# Altium PCB DXv2.pcbdoc (part 2 of 3)
Units mil, origin at the board's own origin, x right, y up, seen from the top; angles counter-clockwise.
Board outline 12846.15 x 9153.85 mil, 2 copper layers (TopLayer, BottomLayer); 114 components, 102 nets, 394 pads, 175 vias.
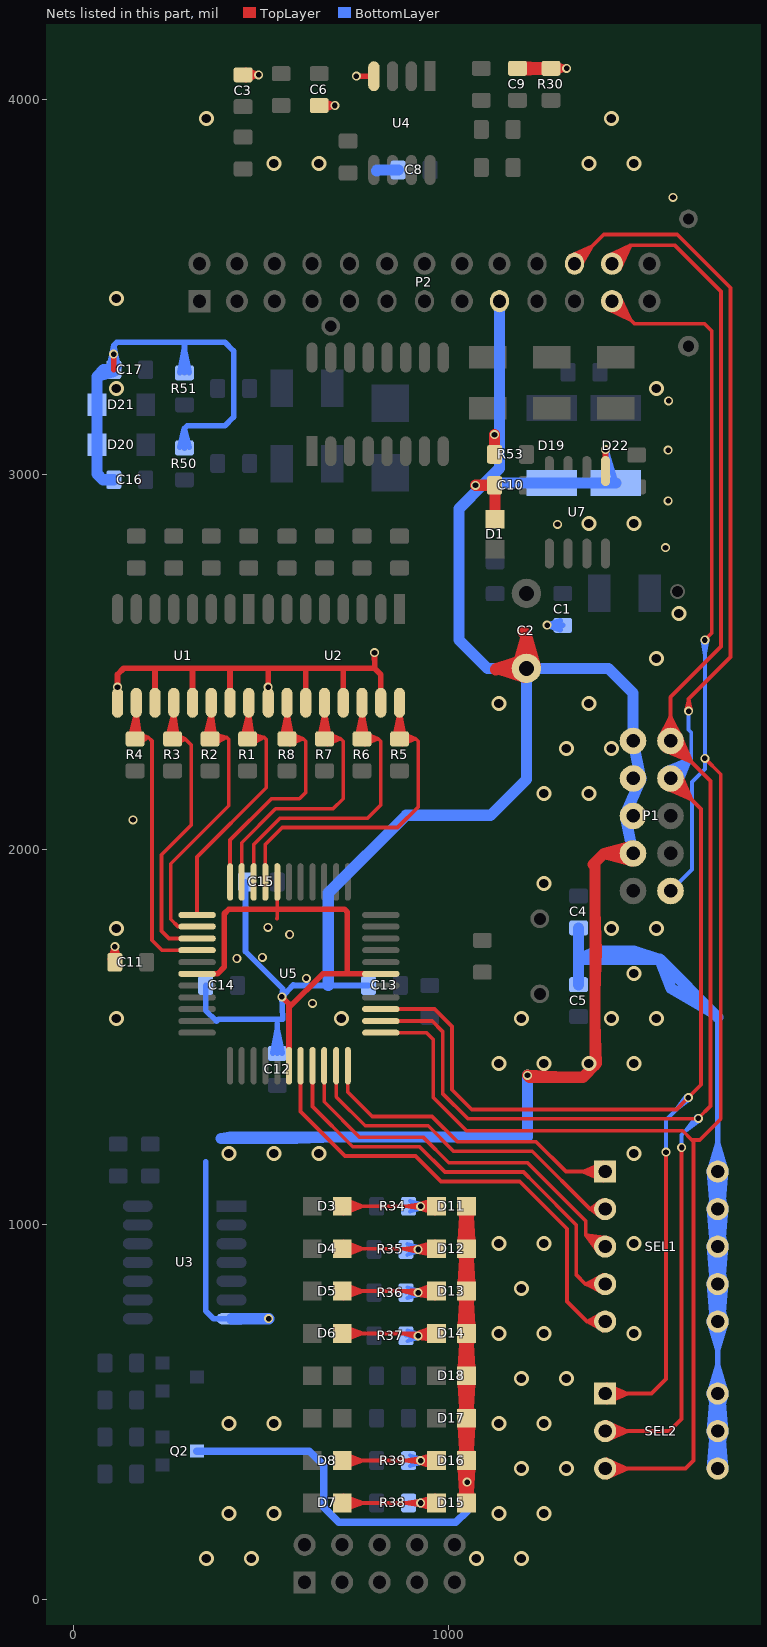
[diagram p2: the nets of this part, all layers, seen from the top]

## Via types
v1: diameter 24, hole 15, TopLayer to BottomLayer, tented both sides, 115 vias
v2: diameter 40, hole 25, TopLayer to BottomLayer, tented both sides, 60 vias

## Nets (pads, with @x,y where several pads share a name; then routed paths per layer and width w, separated by ;. In a path a pad name is that pad's centre, name@x,y a point inside that pad or via, vN(x,y) a via of type N, cw(c..) or ccw(c..) an arc to the next point about the centre after c; other vN are vias at no path point) (continued)
COM2: D11.1 D12.1 D13.1 D14.1 D15.1 D16.1 D17.1 D18.1 Q2.1 | length 9973.8
  TopLayer w20: D17.1@1034.21,484.72 1038.97,398.91 ; D18.1@1034.21,596.79 1038.97,682.6 ; D18.1@1034.21,597.75 1038.97,511.94 ; D14.1@1034.21,709.82 1038.97,795.63 ; D13.1@1034.21,822.84 1038.97,908.65 ; D12.1@1034.21,935.87 1038.97,1021.68 ; D16.1@1034.26,372.54 1049.2,456.21 ; D17.1@1034.26,482.92 1049.2,399.24 D17.1@1064.14,482.92 ; D17.1@1034.26,485.56 1049.2,569.24 ; D18.1@1034.26,595.94 1049.2,512.27 D18.1@1064.14,595.94 ; D18.1@1034.26,598.59 1049.2,682.27 D18.1@1064.14,598.59 ; D14.1@1034.26,708.97 1049.2,625.29 ; D14.1@1034.26,711.62 1049.2,795.29 D14.1@1064.14,711.62 ; D13.1@1034.26,822 1049.2,738.32 ; D13.1@1034.26,824.65 1049.2,908.32 D13.1@1064.14,824.65 ; D12.1@1034.26,935.03 1049.2,851.35 ; D12.1@1034.26,937.67 1049.2,1021.35 D12.1@1064.14,937.67 ; D11.1@1034.26,1048.05 1049.2,964.38 ; D17.1@1034.52,481.16 1059.43,398.91 ; D18.1@1034.52,594.19 1059.43,511.94 ; D18.1@1034.52,600.35 1059.43,682.6 ; D14.1@1034.52,713.37 1059.43,795.63 ; D13.1@1034.52,826.4 1059.43,908.65 ; D12.1@1034.52,939.43 1059.43,1021.68 ; D11.1@1049.2,1049.38 D12.1@1049.2,936.35 ; D17.1@1063.88,481.16 1038.97,398.91 ; D18.1@1063.88,594.19 1038.97,511.94 ; D18.1@1063.88,600.35 1038.97,682.6 ; D14.1@1063.88,713.37 1038.97,795.63 ; D13.1@1063.88,826.4 1038.97,908.65 ; D12.1@1063.88,939.43 1038.97,1021.68 ; D16.1@1064.14,372.54 1049.2,456.21 ; D17.1@1064.14,485.56 1049.2,569.24 ; D14.1@1064.14,708.97 1049.2,625.29 ; D13.1@1064.14,822 1049.2,738.32 ; D12.1@1064.14,935.03 1049.2,851.35 ; D11.1@1064.14,1048.05 1049.2,964.38 ; D17.1@1064.19,484.72 1059.43,398.91 ; D18.1@1064.19,596.79 1059.43,682.6 ; D18.1@1064.19,597.75 1059.43,511.94 ; D14.1@1064.19,709.82 1059.43,795.63 ; D13.1@1064.19,822.84 1059.43,908.65 ; D12.1@1064.19,935.87 1059.43,1021.68 ; 1038.97,285.88 1063.88,368.13 v1(1051.14,313.76) ; 1038.97,285.88 1034.21,371.69 v1(1051.14,313.76) ; 1038.97,285.88 D16.1@1049.2,371.21 ; 1038.97,285.88 v1(1051.14,313.76) ; 1038.97,285.88 v1(1051.14,313.76) ; 1038.97,285.88 v1(1051.14,313.76) ; 1038.97,398.91 D17.1@1049.2,484.24 ; 1038.97,511.94 D18.1@1049.2,597.27 ; 1038.97,682.6 D18.1@1049.2,597.27 ; 1038.97,795.63 D14.1@1049.2,710.29 ; 1038.97,908.65 D13.1@1049.2,823.32 ; 1038.97,1021.68 D12.1@1049.2,936.35 ; 1049.2,286.21 1064.14,369.89 v1(1051.14,313.76) ; 1049.2,286.21 1034.26,369.89 v1(1051.14,313.76) ; 1049.2,286.21 v1(1051.14,313.76) ; 1049.2,286.21 v1(1051.14,313.76) ; 1049.2,343.19 1034.26,259.51 v1(1051.14,313.76) ; 1049.2,343.19 1064.14,259.51 v1(1051.14,313.76) ; 1049.2,343.19 1063.65,367.2 1049.2,343.19 ; 1049.2,343.19 1034.75,367.2 1049.2,343.19 ; 1049.2,343.19 D16.1@1049.2,371.21 ; 1049.2,343.19 D16.1@1049.2,371.21 ; 1049.2,343.19 v1(1051.14,313.76) ; 1049.2,343.19 v1(1051.14,313.76) ; D16.1@1049.2,371.21 D15.1@1049.2,258.19 v1(1051.14,313.76) ; D16.1@1049.2,371.21 D17.1@1049.2,484.24 ; D16.1@1049.2,371.21 1059.43,285.88 ; D16.1@1049.2,371.21 v1(1051.14,313.76) ; D16.1@1049.2,371.21 v1(1051.14,313.76) ; D16.1@1049.2,371.21 v1(1051.14,313.76) ; 1049.2,456.21 1063.65,480.23 1049.2,456.21 ; 1049.2,456.21 1034.75,480.23 1049.2,456.21 ; 1049.2,456.21 D17.1@1049.2,484.24 ; 1049.2,456.21 D17.1@1049.2,484.24 ; D17.1@1049.2,484.24 D18.1@1049.2,597.27 ; D17.1@1049.2,484.24 1059.43,398.91 ; 1049.2,569.24 1063.65,593.25 1049.2,569.24 ; 1049.2,569.24 1034.75,593.25 1049.2,569.24 ; 1049.2,569.24 D18.1@1049.2,597.27 ; 1049.2,569.24 D18.1@1049.2,597.27 ; D18.1@1049.2,597.27 D14.1@1049.2,710.29 ; D18.1@1049.2,597.27 1059.43,682.6 ; D18.1@1049.2,597.27 1049.2,625.29 ; D18.1@1049.2,597.27 1059.43,511.94 ; D18.1@1049.2,597.27 1049.2,625.29 ; 1049.2,625.29 1034.75,601.28 1049.2,625.29 ; 1049.2,625.29 1063.65,601.28 1049.2,625.29 ; D14.1@1049.2,710.29 D13.1@1049.2,823.32 ; D14.1@1049.2,710.29 1059.43,795.63 ; D14.1@1049.2,710.29 1049.2,738.32 ; D14.1@1049.2,710.29 1049.2,738.32 ; 1049.2,738.32 1034.75,714.31 1049.2,738.32 ; 1049.2,738.32 1063.65,714.31 1049.2,738.32 ; D13.1@1049.2,823.32 D12.1@1049.2,936.35 ; D13.1@1049.2,823.32 1059.43,908.65 ; D13.1@1049.2,823.32 1049.2,851.35 ; D13.1@1049.2,823.32 1049.2,851.35 ; 1049.2,851.35 1034.75,827.34 1049.2,851.35 ; 1049.2,851.35 1063.65,827.34 1049.2,851.35 ; D12.1@1049.2,936.35 1059.43,1021.68 ; D12.1@1049.2,936.35 1049.2,964.38 ; D12.1@1049.2,936.35 1049.2,964.38 ; 1049.2,964.38 1034.75,940.36 1049.2,964.38 ; 1049.2,964.38 1063.65,940.36 1049.2,964.38 ; v1(1051.14,313.76) 1064.19,371.69 1059.43,285.88 ; v1(1051.14,313.76) 1059.43,285.88 ; v1(1051.14,313.76) 1059.43,285.88 ; v1(1051.14,313.76) 1059.43,285.88 ; v1(1051.14,313.76) 1034.52,368.13 1059.43,285.88
  BottomLayer w20: Q2.1@330.56,396.69 630.58,396.69 668.5,358.78 668.5,246.24 708.31,206.42 1020.85,206.42 1051.14,236.71 v1(1051.14,313.76) v1@1050.27,314.63 ; Q2.1@331.54,396.69 409.26,396.69
DI01: R1.1 U1.16 U5.23 | length 1262.8
  TopLayer w10: U5.23@330.85,1826.18 330.85,1981.09 515.3,2165.54 515.3,2293.96 509.01,2300.25 ; R1.1@465.52,2300.25 509.01,2300.25 ; R1.1@470.52,2295.59 509.01,2300.25 ; R1.1@471.63,2310.55 509.01,2300.25 ; R1.1@475.17,2281.33 509.01,2300.25
  TopLayer w15: R1.1@465.52,2300.25 468.74,2303.48 U1.16@468.74,2391.99 ; U1.16@465.52,2391.99 U1.16@465.52,2396.65 ; R1.1@468.74,2306.99 U1.16@468.74,2366.99 ; U1.16@468.74,2360.85 453.15,2297.4 U1.16@468.74,2360.89 ; U1.16@468.74,2360.85 478.01,2296.17 U1.16@468.74,2360.89 ; U1.16@468.74,2360.85 R1.1@465.52,2295.59 U1.16@468.74,2360.89
DI02: R2.1 U1.14 U5.24 | length 1340
  TopLayer w10: U5.24@330.85,1795.18 280.25,1795.18 260.85,1814.58 260.85,1963.03 415.3,2117.48 415.3,2293.96 409.01,2300.25 ; R2.1@365.52,2300.25 409.01,2300.25 ; R2.1@370.52,2295.59 409.01,2300.25 ; R2.1@371.63,2310.55 409.01,2300.25 ; R2.1@375.17,2281.33 409.01,2300.25
  TopLayer w15: R2.1@365.52,2300.25 368.75,2303.48 U1.14@368.75,2391.99 ; U1.14@365.52,2391.99 U1.14@365.52,2396.65 ; R2.1@368.75,2306.99 U1.14@368.75,2366.99 ; U1.14@368.75,2360.85 353.15,2297.4 U1.14@368.75,2360.89 ; U1.14@368.75,2360.85 378.01,2296.17 U1.14@368.75,2360.89 ; U1.14@368.75,2360.85 R2.1@365.52,2295.59 U1.14@368.75,2360.89
DI03: R3.1 U1.12 U5.25 | length 1325.3
  TopLayer w10: R3.1@265.52,2295.59 299.37,2295.59 ; R3.1@270.52,2295.59 299.37,2295.59 ; R3.1@274.42,2281.1 299.37,2295.59 ; R3.1@274.42,2310.07 299.37,2295.59 ; U5.25@330.85,1763.18 256.19,1763.18 235.85,1783.53 235.85,1986.51 315.3,2065.96 315.3,2279.66 299.37,2295.59
  TopLayer w15: R3.1@265.52,2300.25 268.75,2303.48 U1.12@268.75,2391.99 ; U1.12@265.52,2391.99 U1.12@265.52,2396.65 ; R3.1@268.75,2306.99 U1.12@268.75,2366.99 ; U1.12@268.75,2360.85 253.15,2297.4 U1.12@268.75,2360.89 ; U1.12@268.75,2360.85 278.01,2296.17 U1.12@268.75,2360.89 ; U1.12@268.75,2360.85 R3.1@265.52,2295.59 U1.12@268.75,2360.89
DI04: R4.1 U1.10 U5.26 | length 1355.3
  TopLayer w10: R4.1@168.75,2300.25 200.87,2300.25 ; R4.1@170.52,2295.59 200.87,2300.25 ; R4.1@171.93,2310.52 200.87,2300.25 ; R4.1@176.35,2281.77 200.87,2300.25 ; U5.26@330.85,1732.18 237.41,1732.18 210.85,1758.75 210.85,2290.27 200.87,2300.25
  TopLayer w15: U1.10@165.52,2391.99 U1.10@165.52,2396.65 ; R4.1@168.75,2306.99 U1.10@168.75,2366.99 ; U1.10@168.75,2391.99 168.75,2300.25 168.75,2298.81 R4.1@165.52,2295.59 ; R4.1@165.52,2295.59 U1.10@168.75,2360.8 ; R4.1@165.52,2295.59 U1.10@168.75,2360.89 ; U1.10@168.75,2360.8 153.15,2297.4 U1.10@168.75,2360.89 ; U1.10@168.75,2360.8 178.01,2296.17 U1.10@168.75,2360.89
DI05: R5.1 U2.16 U5.19 | length 1438.3
  TopLayer w10: U5.19@512.85,1914.18 512.85,2013.93 558.1,2059.18 865.6,2059.18 920.46,2114.04 920.46,2289.29 914.17,2295.59 ; R5.1@870.69,2295.59 914.17,2295.59 ; R5.1@875.69,2295.59 914.17,2295.59 ; R5.1@878.61,2280.87 914.17,2295.59 ; R5.1@878.61,2310.3 914.17,2295.59
  TopLayer w15: R5.1@870.69,2306.99 U2.16@870.69,2366.99 ; U2.16@870.69,2391.99 R5.1@870.69,2295.59 ; R5.1@870.69,2295.59 U2.16@870.69,2360.59 ; R5.1@870.69,2295.59 U2.16@870.69,2360.59 ; U2.16@870.69,2360.59 858.24,2296.79 U2.16@870.69,2360.59 ; U2.16@870.69,2360.59 883.13,2296.79 U2.16@870.69,2360.59
DI06: R6.1 U2.14 U5.20 | length 1301.5
  TopLayer w10: U5.20@481.85,1914.18 481.85,2014.35 551.68,2084.18 785.42,2084.18 820.46,2119.23 820.46,2289.29 814.17,2295.59 ; R6.1@770.69,2295.59 814.17,2295.59 ; R6.1@775.69,2295.59 814.17,2295.59 ; R6.1@778.61,2280.87 814.17,2295.59 ; R6.1@778.61,2310.3 814.17,2295.59
  TopLayer w15: R6.1@770.69,2306.99 U2.14@770.69,2366.99 ; U2.14@770.69,2391.99 R6.1@770.69,2295.59 U2.14@770.69,2360.59 ; U2.14@770.69,2360.59 758.24,2296.79 U2.14@770.69,2360.59 ; U2.14@770.69,2360.59 783.13,2296.79 U2.14@770.69,2360.59
DI07: R7.1 U2.12 U5.21 | length 1291.2
  TopLayer w10: U5.21@449.85,1914.18 449.85,2018.71 540.32,2109.18 693.54,2109.18 720.46,2136.1 720.46,2289.29 714.17,2295.59 ; R7.1@670.69,2295.59 714.17,2295.59 ; R7.1@675.69,2295.59 714.17,2295.59 ; R7.1@678.61,2280.87 714.17,2295.59 ; R7.1@678.61,2310.3 714.17,2295.59
  TopLayer w15: R7.1@670.69,2306.99 U2.12@670.69,2366.99 ; U2.12@670.69,2391.99 R7.1@670.69,2295.59 ; R7.1@670.69,2295.59 U2.12@670.69,2360.59 ; R7.1@670.69,2295.59 U2.12@670.69,2360.59 ; U2.12@670.69,2360.59 658.24,2296.79 U2.12@670.69,2360.59 ; U2.12@670.69,2360.59 683.13,2296.79 U2.12@670.69,2360.59
DI08: R8.1 U2.10 U5.22 | length 1216.5
  TopLayer w10: U5.22@418.85,1914.18 418.85,2025.8 529.11,2136.06 603.58,2136.06 620.46,2152.94 620.46,2289.29 614.17,2295.59 ; R8.1@570.69,2295.59 614.17,2295.59 ; R8.1@575.69,2295.59 614.17,2295.59 ; R8.1@578.61,2280.87 614.17,2295.59 ; R8.1@578.61,2310.3 614.17,2295.59
  TopLayer w15: R8.1@570.69,2306.99 U2.10@570.69,2366.99 ; U2.10@570.69,2391.99 R8.1@570.69,2295.59 ; R8.1@570.69,2295.59 U2.10@570.69,2360.59 ; R8.1@570.69,2295.59 U2.10@570.69,2360.59 ; U2.10@570.69,2360.59 558.24,2296.79 U2.10@570.69,2360.59 ; U2.10@570.69,2360.59 583.13,2296.79 U2.10@570.69,2360.59
GND: C1.2 C2.2 C3.2 C4.2 C5.2 C6.2 C8.1 C9.2 C10.1 C11.2 C12.2 C13.2 C14.2 C15.2 C16.2 C17.2 D1.2 D19.A D20.A D21.A D22.A P1.4 P1.6 P1.8 P1.10 P2.9 R30.1 R50.1 R51.1 R53.1 SEL1.6 SEL1.7 SEL1.8 SEL1.9 SEL1.10 SEL2.4 SEL2.5 SEL2.6 U1.9 U1.11 U1.13 U1.15 U2.9 U2.11 U2.13 U2.15 U3.7 U4.4 U5.6 U5.18 U5.28 U5.39 U7.5 | length 26172.9
  TopLayer w10: 543.64,1817.01 544.85,1818.23 544.85,1841.68 U5.18@544.85,1914.18
  TopLayer w15: U1.11@218.74,2391.99 218.74,2483.11 ; U1.11@218.74,2416.99 218.74,2476.99 ; U1.13@318.75,2391.99 318.75,2483.11 ; U1.13@318.75,2416.99 318.75,2476.99 ; U5.28@330.85,1669.18 384.98,1669.18 403.39,1687.59 403.39,1829.36 415.71,1841.68 544.85,1841.68 723.47,1841.68 731.25,1833.9 731.25,1669.18 ; U1.15@418.75,2391.99 418.75,2483.11 ; U1.15@418.75,2416.99 418.75,2476.99 ; v1(556.95,1607.77) 575.85,1588.87 575.85,1579.22 ; U5.39@575.85,1424.18 575.85,1579.22 ; U2.11@620.69,2391.99 620.69,2483.11 ; U2.11@620.69,2416.99 620.69,2476.99 ; U2.13@720.69,2391.99 720.69,2483.11 ; U2.13@720.69,2416.99 720.69,2476.99 ; U2.15@820.69,2391.99 820.69,2467.55 ; U2.15@820.69,2416.99 820.69,2467.55 ; U5.6@820.85,1669.18 731.25,1669.18 ; C9.2@1185.21,4083.69 R30.1@1274.54,4083.69 ; C9.2@1189.51,4071.21 R30.1@1255.37,4073.78 ; C9.2@1189.51,4096.17 R30.1@1255.37,4093.61 ; C9.2@1193.25,4071.57 R30.1@1255.37,4093.61 ; C9.2@1193.25,4095.82 R30.1@1255.37,4073.78 ; R30.1@1268.34,4071.25 C9.2@1204.54,4083.69 ; R30.1@1268.34,4096.13 C9.2@1204.54,4083.69 ; R30.1@1269.54,4083.69 C9.2@1204.54,4083.69 ; U7.5@1420.06,3010.06 v1(1420.06,3066.78) ; v1(111.32,1741.85) v1@111.46,1741.71 ; v1(111.32,1741.85) C11.2@111.46,1700.18 v1@111.46,1741.71 ; v1(111.32,1741.85) 99.14,1707.32 v1@111.46,1741.71 ; v1(111.32,1741.85) 123.77,1707.32 v1@111.46,1741.71 ; v1(111.32,1741.85) 111.46,1705.18 v1@111.46,1741.71 ; v1(118.6,2433.66) v1@118.75,2433.51 ; v1(118.6,2433.66) U1.9@118.75,2416.99 ; v1(118.6,2433.66) U1.9@118.75,2416.99 ; v1(118.6,2433.66) U1.9@118.75,2416.99 ; v1(118.6,2433.66) 118.75,2467.55 ; v1(118.6,2433.66) U1.9@118.75,2391.99 ; v1(118.6,2433.66) U1.9@118.75,2391.99 ; v1(118.6,2433.66) 118.75,2467.55 ; v1(118.6,2433.66) U1.9@118.75,2416.99 ; U1.9@118.75,2391.99 118.75,2467.55 ; U1.9@118.75,2391.99 v1@118.75,2433.51 ; U1.9@118.75,2416.99 v1@118.75,2433.51 ; U1.9@118.75,2416.99 118.75,2467.55 ; U1.9@118.75,2416.99 v1@118.75,2433.51 ; 118.75,2467.55 135.28,2484.08 804.15,2484.08 ; v1@495.03,4066.5 C3.2@453.5,4066.5 v1(495.17,4066.64) ; v1@495.03,4066.5 v1(495.17,4066.64) ; v1@495.03,4066.5 460.64,4078.82 v1(495.17,4066.64) ; v1@495.03,4066.5 460.64,4054.18 v1(495.17,4066.64) ; v1@495.03,4066.5 458.5,4066.5 v1(495.17,4066.64) ; v1(520.54,2433.66) v1@520.69,2433.51 ; v1(520.54,2433.66) U2.9@520.69,2416.99 ; v1(520.54,2433.66) U2.9@520.69,2416.99 ; v1(520.54,2433.66) U2.9@520.69,2416.99 ; v1(520.54,2433.66) 520.69,2483.11 U2.9@520.69,2391.99 ; v1(520.54,2433.66) U2.9@520.69,2391.99 ; v1(520.54,2433.66) U2.9@520.69,2391.99 ; v1(520.54,2433.66) 520.69,2476.99 U2.9@520.69,2416.99 ; v1(520.54,2433.66) U2.9@520.69,2416.99 ; U2.9@520.69,2391.99 v1@520.69,2433.51 ; U2.9@520.69,2416.99 v1@520.69,2433.51 ; U2.9@520.69,2416.99 v1@520.69,2433.51 ; 575.85,1579.22 665.81,1669.18 731.25,1669.18 ; v1@698.03,3984.65 v1(698.17,3984.79) ; v1@698.03,3984.65 C6.2@656.5,3984.65 v1(698.17,3984.79) ; v1@698.03,3984.65 663.64,3996.97 v1(698.17,3984.79) ; v1@698.03,3984.65 663.64,3972.33 v1(698.17,3984.79) ; v1@698.03,3984.65 661.5,3984.65 v1(698.17,3984.79) ; v1(755.64,4062.76) U4.4@802.18,4062.76 ; v1(755.64,4062.76) U4.4@802.18,4062.76 ; v1(755.64,4062.76) U4.4@802.18,4062.76 ; v1(755.64,4062.76) U4.4@802.18,4062.76 ; 804.15,2484.08 820.69,2467.55 ; 804.15,2484.08 804.15,2525.61 v1(804,2525.76) 804.15,2484.08 ; C9.2@1190.21,4083.69 R30.1@1255.21,4083.69 ; C9.2@1190.21,4083.69 R30.1@1255.37,4093.61 ; C9.2@1190.21,4083.69 R30.1@1255.21,4083.69 ; C9.2@1190.21,4083.69 R30.1@1255.37,4073.78 ; R30.1@1255.21,4083.69 1191.41,4096.13 R30.1@1255.21,4083.69 ; R30.1@1255.21,4083.69 1191.41,4071.25 R30.1@1255.21,4083.69 ; R30.1@1274.54,4083.69 v1@1316.07,4083.69 ; R30.1@1274.54,4083.69 v1(1316.21,4083.84) ; v1@1316.07,4083.69 v1(1316.21,4083.84) ; v1@1316.07,4083.69 1281.68,4096.01 v1(1316.21,4083.84) ; v1@1316.07,4083.69 1281.68,4071.38 v1(1316.21,4083.84) ; v1@1316.07,4083.69 1279.54,4083.69 v1(1316.21,4083.84) ; v1(108.59,3321.85) 108.73,3321.71 108.73,3280.18 v1(108.59,3321.85)
  TopLayer w30: v1(1073.29,2971.63) 1073.5,2971.83 C10.1@1124.15,2971.83 ; v1(1124.01,3107.05) 1124.15,3106.91 R53.1@1124.15,3054.4 ; D1.2@1125.59,2881.45 C10.1@1125.59,2971.83 ; 1126.97,2480 cw(c1130.58,2480) 1130.58,2483.61 ; C2.2@1185.02,2487.01 1209.15,2570.85 ; 1200,2580 cw(c1200,2570.85) 1209.15,2570.85 ; C2.2@1205.37,2459.53 1130.58,2483.61 ; C2.2@1205.37,2507.68 1130.58,2483.61 ; C2.2@1233.28,2487.01 1209.15,2570.85 ; 1315.49,1393.32 v1(1212,1398.49) 1217.17,1393.32 1359.73,1393.32 ; 1392.13,1540.22 1395.3,1430.03 1359.73,1393.32 ; 1392.13,1619.81 1395.3,1730.03 1392.13,1840.24 ; P1.4@1490.63,1969.9 1416.18,1990.15 ; P1.4@1490.63,2010.4 1416.18,1990.15 ; P1.4@1493.33,1990.15 1416.18,1990.15 ; 1130.58,2483.61 C2.2@1209.15,2483.61 ; 1130.58,2483.61 C2.2@1209.15,2483.61 ; C2.2@1209.15,2483.61 1209.15,2570.85 ; 1359.73,1393.32 1392.13,1425.71 1392.13,1955.71 1386.94,1960.91 1416.18,1990.15
  BottomLayer w15: R51.1@284.79,3272.88 297.24,3336.67 R51.1@309.68,3272.88 ; R50.1@284.83,3073.08 297.24,3123.37 ; R50.1@297.24,3071.57 297.24,3123.37 ; R51.1@297.24,3271.67 297.24,3349.3 293.25,3353.28 ; R50.1@309.64,3073.08 297.24,3123.37 ; 353.5,1168.48 353.5,770.67 374.56,749.61 U3.7@422.64,749.61 ; C14.2@353.71,1638.18 353.71,1571.94 382.67,1542.99 387.85,1548.17 558.9,1548.17 ; C15.2@459.85,1914.18 459.85,1728.86 558.9,1629.81 v1(556.95,1607.77) ; C12.2@532.41,1458.24 544.85,1522.03 C12.2@557.29,1458.24 ; C12.2@544.85,1457.03 544.85,1536.51 ; 558.9,1550.67 v1(556.95,1607.77) ; 587.52,1639.81 v1(556.95,1607.77) ; 588.01,1638.18 680.71,1638.18 C13.2@787.99,1638.18 ; v1(1420.06,3066.78) D22.A@1447.12,2977.75 ; SEL2.4@1697.01,348.73 SEL2.5@1703.57,425.95 ; SEL2.5@1697.01,448.73 SEL2.6@1703.57,525.96 ; SEL1.7@1697.01,843.27 SEL1.6@1703.57,766.04 ; SEL1.8@1697.01,943.27 SEL1.7@1703.57,866.04 ; SEL1.9@1697.01,1043.27 SEL1.8@1703.57,966.05 ; SEL1.10@1697.01,1143.27 SEL1.9@1703.57,1066.05 ; SEL2.4@1697.21,353.26 1719,424.53 SEL2.4@1740.79,353.26 ; SEL2.5@1697.21,446.74 1719,375.47 SEL2.5@1740.79,446.74 ; SEL2.5@1697.21,453.26 1719,524.53 SEL2.5@1740.79,453.26 ; SEL2.6@1697.21,546.74 1719,475.47 SEL2.6@1740.79,546.74 ; SEL2.6@1697.21,553.26 1719,624.53 SEL2.6@1740.79,553.26 ; SEL1.6@1697.21,738.74 1719,667.47 SEL1.6@1740.79,738.74 ; SEL1.6@1697.21,745.26 1719,816.53 SEL1.6@1740.79,745.26 ; SEL1.7@1697.21,838.74 1719,767.47 SEL1.7@1740.79,838.74 ; SEL1.7@1697.21,845.26 1719,916.53 SEL1.7@1740.79,845.26 ; SEL1.8@1697.21,938.74 1719,867.47 SEL1.8@1740.79,938.74 ; SEL1.8@1697.21,945.26 1719,1016.53 SEL1.8@1740.79,945.26 ; SEL1.9@1697.21,1038.74 1719,967.47 SEL1.9@1740.79,1038.74 ; SEL1.9@1697.21,1045.26 1719,1116.53 SEL1.9@1740.79,1045.26 ; SEL1.10@1697.21,1138.74 1719,1067.47 SEL1.10@1740.79,1138.74 ; SEL1.10@1697.21,1145.26 1719,1216.53 SEL1.10@1740.79,1145.26 ; SEL2.4@1698.26,357.41 SEL2.5@1734.43,425.95 ; SEL2.5@1698.26,457.41 SEL2.6@1734.43,525.96 ; SEL1.7@1698.26,834.59 SEL1.6@1734.43,766.04 ; SEL1.8@1698.26,934.59 SEL1.7@1734.43,866.05 ; SEL1.9@1698.26,1034.59 SEL1.8@1734.43,966.05 ; SEL1.10@1698.26,1134.59 SEL1.9@1734.43,1066.05 ; 1719,1553.68 SEL1.10@1719,1142 ; SEL2.4@1739.74,357.41 SEL2.5@1703.57,425.95 ; SEL2.5@1739.74,457.41 SEL2.6@1703.57,525.96 ; SEL1.7@1739.74,834.59 SEL1.6@1703.57,766.04 ; SEL1.8@1739.74,934.59 SEL1.7@1703.57,866.04 ; SEL1.9@1739.74,1034.59 SEL1.8@1703.57,966.05 ; SEL1.10@1739.74,1134.59 SEL1.9@1703.57,1066.05 ; SEL2.4@1740.99,348.73 SEL2.5@1734.43,425.95 ; SEL2.5@1740.99,448.73 SEL2.6@1734.43,525.96 ; SEL1.7@1740.99,843.27 SEL1.6@1734.43,766.04 ; SEL1.8@1740.99,943.27 SEL1.7@1734.43,866.05 ; SEL1.9@1740.99,1043.27 SEL1.8@1734.43,966.05 ; SEL1.10@1740.99,1143.27 SEL1.9@1734.43,1066.05 ; v1(108.59,3321.85) 108.73,3345 ; v1(108.59,3321.85) C17.2@108.73,3280.18 108.73,3345 ; v1(108.59,3321.85) 108.73,3345 ; v1(108.59,3321.85) 96.3,3286.48 108.73,3345 ; v1(108.59,3321.85) 121.16,3286.48 108.73,3345 ; v1(108.59,3321.85) 108.73,3345 ; v1(108.59,3321.85) 108.73,3345 ; v1(108.59,3321.85) 108.73,3285.18 108.73,3345 ; 108.73,3345 117.02,3353.28 293.25,3353.28 ; 293.25,3353.28 405.33,3353.28 428.43,3330.19 428.43,3154.13 404.69,3130.4 304.27,3130.4 297.24,3123.37 ; v1(1264.42,2598.75) v1@1264.56,2598.61 ; v1(1264.42,2598.75) C1.2@1306.09,2598.61 v1@1264.56,2598.61 ; v1(1264.42,2598.75) 1298.95,2586.29 v1@1264.56,2598.61 ; v1(1264.42,2598.75) 1298.95,2610.93 v1@1264.56,2598.61 ; v1(1264.42,2598.75) 1301.09,2598.61 v1@1264.56,2598.61 ; SEL2.5@1703.57,425.95 SEL2.4@1719,350 ; SEL2.6@1703.57,525.96 SEL2.5@1719,450 ; SEL1.6@1703.57,766.04 SEL1.7@1719,842 ; SEL1.7@1703.57,866.04 SEL1.8@1719,942 SEL1.7@1734.43,866.05 ; SEL1.8@1703.57,966.05 SEL1.9@1719,1042 SEL1.8@1734.43,966.05 ; SEL1.9@1703.57,1066.05 SEL1.10@1719,1142 ; SEL2.4@1719,350 SEL2.5@1719,450 ; SEL2.4@1719,350 SEL2.5@1734.43,425.95 ; SEL2.5@1719,450 SEL2.6@1719,550 SEL1.6@1719,742 SEL1.7@1719,842 ; SEL2.5@1719,450 SEL2.6@1734.43,525.96 ; SEL1.7@1719,842 SEL1.10@1719,1142 ; SEL1.7@1719,842 SEL1.6@1734.43,766.04 ; SEL1.10@1719,1142 SEL1.9@1734.43,1066.05
  BottomLayer w30: D20.A@63.73,3066.67 63.73,3181.67 63.73,3085.07 D21.A@63.73,3186.67 ; D20.A@63.73,3075.07 63.73,3002.71 ; D21.A@63.73,3191.67 63.73,3262.29 ; C16.2@108.73,2986.57 79.88,2986.57 63.73,3002.71 ; C17.2@108.73,3275.18 63.73,3262.29 ; U3.7@422.64,749.61 v1(521.73,749.61) ; 485,1233.93 595.3,1230.03 ; 505.66,1233.93 395.3,1230.03 ; 605.66,1233.93 495.3,1230.03 ; 680.71,1638.18 680.71,1884.44 888.04,2091.77 1113.51,2091.77 1209.15,2187.41 C2.2@1209.15,2483.61 ; 705.65,1233.93 595.3,1230.03 ; 810,3810 cw(c812.76,3810) 812.76,3812.76 C8.1@867.18,3812.76 ; P2.9@1137.25,3462.84 1137.25,3017.42 1097.58,2977.75 ; v1(1212,1398.49) 1212,1233.93 418.95,1233.93 ; D22.A@1447.12,2977.75 D19.A@1276.41,2977.75 1097.58,2977.75 ; P1.6@1473,2088.06 P1.4@1493.33,1990.15 ; P1.6@1473.85,2096.32 P1.8@1513.66,2188.06 ; 1513.06,1708.2 1395.3,1730.03 ; P1.8@1513.66,2192.24 P1.10@1493.33,2290.15 1493.33,2418.1 1427.82,2483.61 C2.2@1209.15,2483.61 ; 1708.22,1564.46 1595.3,1630.03 1564.48,1708.2 ; 1719,1553.68 1564.48,1708.2 ; 63.73,3002.71 D21.A@63.73,3186.67 ; D21.A@63.73,3186.67 63.73,3262.29 ; 63.73,3262.29 81.62,3280.18 ; 81.62,3280.18 C17.2@108.73,3280.18 81.62,3280.18 ; 395.3,1230.03 418.95,1233.93 ; 395.3,1230.03 495.3,1230.03 ; 395.3,1230.03 418.95,1233.93 ; 418.95,1233.93 495.3,1230.03 ; 495.3,1230.03 595.3,1230.03 ; 1097.58,2977.75 1029.29,2909.46 1029.29,2559.58 1105.26,2483.61 C2.2@1209.15,2483.61 ; 1348.07,1708.2 C5.2@1348.07,1640.19 1348.07,1708.2 ; 1348.07,1708.2 C4.2@1348.07,1791.67 1348.07,1708.2 ; 1348.07,1708.2 1564.48,1708.2 ; 1348.07,1708.2 1395.3,1730.03 ; 1395.3,1730.03 1495.3,1730.03 ; 1395.3,1730.03 1377.81,1708.2 1495.3,1730.03 ; 1495.3,1730.03 1564.48,1708.2
  other v1: 638.58,1590.4 622.34,1657.35 436.7,1710.11 504.67,1713.15 577.71,1774.02 519.89,1793.3 160,2080 1580.03,2805.76 1291.91,2867.64 1587.13,2930.54 1587.13,3065.47 1588.15,3197.36 1600,3740
  other v2: 355.3,110.03 475.3,110.03 1075.3,110.03 1195.3,110.03 415.3,230.03 535.3,230.03 1135.3,230.03 1255.3,230.03 1195.3,350.03 1315.3,350.03 415.3,470.03 535.3,470.03 1135.3,470.03 1255.3,470.03 1195.3,590.03 1315.3,590.03 1135.3,710.03 1255.3,710.03 1495.3,710.03 1195.3,830.03 1135.3,950.03 1255.3,950.03 1495.3,950.03 415.3,1190.03 535.3,1190.03 655.3,1190.03 1495.3,1190.03 1135.3,1430.03 1255.3,1430.03 1375.3,1430.03 1495.3,1430.03 115.3,1550.03 715.3,1550.03 1195.3,1550.03 1435.3,1550.03 1555.3,1550.03 1495.3,1670.03 115.3,1790.03 1435.3,1790.03 1555.3,1790.03 1255.3,1910.03 1255.3,2150.03 1375.3,2150.03 1315.3,2270.03 1435.3,2270.03 1135.3,2390.03 1375.3,2390.03 1555.3,2510.03 1615.3,2630.03 1375.3,2870.03 1495.3,2870.03 115.3,3230.03 1555.3,3230.03 115.3,3470.03 535.3,3830.03 655.3,3830.03 1375.3,3830.03 1495.3,3830.03 355.3,3950.03 1435.3,3950.03
KEY1: P1.1 P2.12 SEL2.3 U5.1 | length 5665.7
  TopLayer w10: U5.1@820.85,1512.18 942.5,1512.18 960.62,1494.06 960.62,1339.66 1049.58,1250.7 1625.68,1250.7 1650.11,1226.26 ; SEL2.3@1419,350 1633.42,350 1654.79,371.37 1654.79,1221.58 1650.11,1226.26 ; SEL2.3@1420.77,335.58 1478.53,350 ; SEL2.3@1420.77,364.42 1478.53,350 ; P2.12@1423.13,3442.79 1487.99,3412.1 ; SEL2.3@1424.05,326 1478.53,350 ; SEL2.3@1424.05,374 1478.53,350 ; P2.12@1428.07,3451.58 1487.99,3412.1 ; P2.12@1437.25,3462.84 1497.49,3402.6 1684.29,3402.6 1702.96,3383.94 1702.96,2577.57 v1(1684.95,2559.56) ; P2.12@1448.51,3472.02 1487.99,3412.1 ; P2.12@1457.31,3476.97 1487.99,3412.1 ; v1(1684.95,2243.66) 1727.4,2201.22 1727.4,1282.5 1671.16,1226.26 1650.11,1226.26
  BottomLayer w10: P1.1@1593.33,1890.15 1650.88,1947.69 1650.88,2181 1684.95,2215.08 v1(1684.95,2243.66) v1(1684.95,2559.56) ; v1@1677.98,2558.98 1684.95,2517.56 v1@1691.93,2558.98
KEY2: P1.9 P2.25 SEL2.2 U5.2 | length 6381.5
  TopLayer w10: U5.2@820.85,1543.18 958.15,1543.18 985.62,1515.71 985.62,1350.01 1052.94,1282.7 v1@1667.27,1282.7 ; SEL2.2@1419,450 1590.45,450 1622.79,482.34 v1(1622.79,1206.07) ; SEL2.2@1420.77,435.58 1478.53,450 ; SEL2.2@1420.77,464.42 1478.53,450 ; P2.25@1423.21,3582.96 1486.78,3612.37 ; SEL2.2@1424.05,426 1478.53,450 ; SEL2.2@1424.05,474 1478.53,450 ; P2.25@1428.1,3574.13 1486.78,3612.37 ; P2.25@1437.25,3562.84 1486.78,3612.37 ; P2.25@1448.54,3553.69 1486.78,3612.37 ; P2.25@1457.37,3548.8 1486.78,3612.37 ; P1.9@1563.73,2297.23 1593.33,2355.58 ; P1.9@1573.15,2293.34 1593.33,2355.58 ; P1.9@1576.27,2264.95 1649.89,2233.47 ; P1.9@1580.83,2273.99 1649.89,2233.47 ; P1.9@1582.93,2290.98 1593.33,2355.58 ; P1.9@1586.44,2282.31 1649.89,2233.47 ; P1.9@1601.18,2297.02 1649.89,2233.47 ; P1.9@1603.73,2290.98 1593.33,2355.58 ; P1.9@1609.52,2302.62 1649.89,2233.47 ; P1.9@1613.51,2293.34 1593.33,2355.58 ; P1.9@1618.57,2307.16 1649.89,2233.47 ; P1.9@1622.93,2297.23 1593.33,2355.58 ; v1(1667.27,1284.11) 1699.74,1316.57 1699.74,2183.74 1671.82,2211.66 1671.7,2211.66 1593.33,2290.03 P1.9@1593.33,2290.15 ; 1486.78,3612.37 1604.06,3612.37 1727.96,3488.47 1727.96,2541.71 1593.33,2407.08 1593.49,2406.92 1593.49,2369.07 1593.33,2368.9 P1.9@1593.33,2290.15 ; P1.9@1593.33,2290.15 1649.89,2233.47
  BottomLayer w10: v1(1622.79,1206.07) 1622.79,1239.62 v1(1667.27,1284.11) 1634.06,1250.89 ; v1@1661.97,1288.67 1634.06,1250.89 ; v1@1671.84,1278.8 1634.06,1250.89
KEY3: P1.7 P2.24 SEL2.1 U5.3 | length 6488.6
  TopLayer w10: U5.3@820.85,1575.18 964.05,1575.18 1010.62,1528.61 1010.62,1360.37 1063.29,1307.7 1609.2,1307.7 v1(1640.59,1339.08) 1674.74,1373.24 1674.74,2108.74 P1.7@1593.33,2190.15 ; P2.24@1326.42,3584.18 1383.47,3609.06 ; P2.24@1331.17,3575.31 1383.47,3609.06 ; P2.24@1337.25,3562.84 1415.04,3640.63 1611.16,3640.63 1752.96,3498.82 1752.96,2513.75 1641.54,2402.33 ; P2.24@1337.25,3567.37 1383.47,3609.06 ; P2.24@1344.53,3560.51 1383.47,3609.06 ; P2.24@1352.86,3554.87 1383.47,3609.06 ; SEL2.1@1419,550 1542.72,550 1581.32,588.6 v1(1581.32,1193.76) ; SEL2.1@1420.77,535.58 1478.53,550 ; SEL2.1@1420.77,564.42 1478.53,550 ; SEL2.1@1424.05,526 1478.53,550 ; SEL2.1@1424.05,574 1478.53,550 ; P1.7@1576.29,2164.93 1649.98,2133.5 ; P1.7@1580.84,2173.98 1649.98,2133.5 ; P1.7@1586.45,2182.31 1649.98,2133.5 ; P1.7@1601.17,2197.03 1649.98,2133.5 ; P1.7@1609.5,2202.64 1649.98,2133.5 ; P1.7@1618.55,2207.19 1649.98,2133.5 ; v1@1634.58,2370.31 1641.54,2402.33 ; v1(1641.54,2369.56) 1641.54,2402.33 ; v1@1648.5,2370.31 1641.54,2402.33
  BottomLayer w10: P1.7@1576.4,2215.44 1648.76,2245.58 ; P1.7@1580.89,2206.36 1648.76,2245.58 ; v1(1581.32,1193.76) 1581.32,1279.82 v1(1640.59,1339.08) 1607.37,1305.87 ; P1.7@1586.46,2198 1648.76,2245.58 ; P1.7@1593.33,2190.15 1648.76,2245.58 ; P1.7@1601.18,2183.28 1648.76,2245.58 ; P1.7@1609.54,2177.71 1648.76,2245.58 ; P1.7@1618.62,2173.22 1648.76,2245.58 ; v1@1635.28,1343.65 1607.37,1305.87 ; v1(1641.54,2369.56) 1641.54,2320.33 1648.76,2313.11 1648.76,2245.58 ; v1@1645.15,1333.78 1607.37,1305.87
KEY4: SEL1.1 U5.44 | length 1141.8
  TopLayer w10: U5.44@732.85,1424.18 732.85,1353.99 797.91,1288.93 957.47,1288.93 1025.06,1221.33 1234.9,1221.33 1314.23,1142 SEL1.1@1419,1142 1359.47,1142 ; SEL1.1@1413.95,1118 1359.47,1142 ; SEL1.1@1413.95,1166 1359.47,1142 ; SEL1.1@1417.23,1127.58 1359.47,1142 ; SEL1.1@1417.23,1156.42 1359.47,1142
KEY5: SEL1.2 U5.43 | length 1084.6
  TopLayer w10: U5.43@701.85,1424.18 701.85,1341.15 779.07,1263.93 947.11,1263.93 1014.71,1196.33 1224.54,1196.33 1378.87,1042 ; SEL1.2@1411.5,1018.65 1378.87,1042 ; SEL1.2@1411.5,1065.35 1378.87,1042 ; SEL1.2@1416.37,1027.71 1378.87,1042 ; SEL1.2@1416.37,1056.29 1378.87,1042 ; SEL1.2@1419,1042 1378.87,1042
KEY6: SEL1.3 U5.42 | length 1330.6
  TopLayer w10: U5.42@669.85,1424.18 669.85,1327.9 764.6,1233.14 934.36,1233.14 1001.96,1165.54 1211.79,1165.54 1367.13,1010.2 1367.13,973.7 ; SEL1.3@1402.25,924.08 1367.13,973.7 ; SEL1.3@1410,930.6 1367.13,973.7 ; SEL1.3@1425.04,955.21 1367.13,973.7 ; SEL1.3@1427.3,965.08 1367.13,973.7 ; 1367.13,973.7 1398.83,942 SEL1.3@1419,942 1367.13,973.7
KEY7: SEL1.4 U5.41 | length 1375.6
  TopLayer w10: U5.41@638.85,1424.18 638.85,1315.06 745.76,1208.14 924,1208.14 991.6,1140.54 1201.44,1140.54 1232.56,1109.42 1342.13,999.85 1342.13,961.07 1342.22,960.98 1342.22,865.81 1366.03,842 ; SEL1.4@1413.32,818.14 1366.03,842 ; SEL1.4@1413.32,865.86 1366.03,842 ; SEL1.4@1417.01,827.61 1366.03,842 ; SEL1.4@1417.01,856.39 1366.03,842 ; SEL1.4@1419,842 1366.03,842
KEY8: SEL1.5 U5.40 | length 1475.4
  TopLayer w10: U5.40@606.85,1424.18 606.85,1301.8 725.51,1183.14 913.65,1183.14 981.24,1115.54 1191.08,1115.54 1317.13,989.49 1317.13,795.09 1370.22,742 ; SEL1.5@1412.83,718.26 1370.22,742 ; SEL1.5@1412.83,765.74 1370.22,742 ; SEL1.5@1416.84,727.63 1370.22,742 ; SEL1.5@1416.84,756.37 1370.22,742 ; SEL1.5@1419,742 1370.22,742
LED-001: D3.2 D11.2 R34.2 | length 1873.1
  TopLayer w10: D3.2@718.84,1039.42 772.94,1049.38 ; D3.2@718.84,1059.33 772.94,1049.38 ; D3.2@721.57,1029.71 772.94,1049.38 ; D3.2@721.57,1069.04 772.94,1049.38 ; v1@924.47,1042.91 D11.2@965.56,1029.71 ; v1@924.47,1055.85 D11.2@965.56,1069.04 ; v1@926.07,1042.46 D11.2@968.29,1039.42 ; v1@926.07,1056.29 D11.2@968.29,1059.33 ; v1@926.56,1042.4 885.14,1049.38 v1@926.56,1056.35 ; v1@927.73,1042.4 969.14,1049.38 v1@927.73,1056.35 ; v1@929.35,1042.73 D11.2@968.29,1059.33 ; v1@929.35,1056.02 D11.2@968.29,1039.42 ; v1@930.83,1043.42 D11.2@965.56,1069.04 ; v1@930.83,1055.33 D11.2@965.56,1029.71 ; D11.2@969.2,1049.38 D3.2@717.94,1049.38 772.94,1049.38 ; 914.2,1049.38 D11.2@965.56,1029.71 ; 914.2,1049.38 D11.2@965.56,1069.04 ; 914.2,1049.38 D11.2@968.29,1039.42 ; 914.2,1049.38 D11.2@968.29,1059.33 ; 914.2,1049.38 v1@925.25,1042.64 ; 914.2,1049.38 v1@925.25,1056.12 ; 914.2,1049.38 v1(927.14,1049.38) ; 914.2,1049.38 v1@925.25,1042.64 ; 914.2,1049.38 v1@925.25,1056.12 ; 914.2,1049.38 v1(927.14,1049.38) ; 914.2,1049.38 v1@925.25,1042.64 ; 914.2,1049.38 v1@925.25,1056.12 ; 914.2,1049.38 v1(927.14,1049.38) ; 914.2,1049.38 v1@925.25,1042.64 ; 914.2,1049.38 v1@925.25,1056.12 ; 914.2,1049.38 v1(927.14,1049.38) ; v1(927.14,1049.38) D11.2@965.56,1069.04 ; v1(927.14,1049.38) D11.2@968.29,1039.42 ; v1(927.14,1049.38) D11.2@968.29,1059.33 ; v1(927.14,1049.38) D11.2@965.56,1029.71
  BottomLayer w10: v1@923.32,1043.51 R34.2@898.34,1063.97 ; v1@923.32,1055.24 R34.2@898.34,1034.79 ; v1@926.39,1042.42 R34.2@894.86,1049.38 ; v1@926.39,1056.34 R34.2@894.86,1049.38 ; v1@929.61,1042.83 R34.2@898.34,1034.79 ; v1@929.61,1055.93 R34.2@898.34,1063.97 ; R34.2@894.86,1049.38 v1(927.14,1049.38) ; R34.2@898.34,1034.79 v1(927.14,1049.38) ; R34.2@898.34,1063.97 v1(927.14,1049.38)
LED-002: D4.2 D12.2 R35.2 | length 1749
  TopLayer w10: D4.2@717.94,936.35 D12.2@969.2,936.35 ; D4.2@718.84,926.39 772.94,936.35 ; D4.2@718.84,946.31 772.94,936.35 ; D4.2@721.57,916.68 772.94,936.35 ; D4.2@721.57,956.02 772.94,936.35 ; v1@917.53,940.76 D12.2@959.3,953.62 ; v1@918.14,927.54 D12.2@960.1,918.77 ; v1@918.92,941.15 D12.2@961.35,945.03 ; v1@919.2,927.31 877.96,936.35 ; v1@919.6,927.27 D12.2@961.78,927.59 ; v1@919.89,941.25 877.96,936.35 ; v1@920.36,941.25 D12.2@962.23,936.35 ; v1@921.05,927.31 D12.2@962.23,936.35 ; v1@921.8,941.05 D12.2@961.78,927.59 ; v1@922.44,927.65 D12.2@961.35,945.03 ; v1@923.18,940.55 D12.2@960.1,918.77 ; v1@923.72,928.25 D12.2@959.3,953.62 ; D12.2@965.56,916.68 v1@914.2,936.35 ; D12.2@965.56,956.02 v1@914.2,936.35 ; D12.2@968.29,926.39 v1@914.2,936.35 ; D12.2@968.29,946.31 v1@914.2,936.35 ; 877.96,936.35 v1(920.12,934.25) ; v1(920.12,934.25) D12.2@960.1,918.77 ; v1(920.12,934.25) D12.2@961.78,927.59 ; v1(920.12,934.25) D12.2@959.3,953.62 ; v1(920.12,934.25) D12.2@961.35,945.03 ; v1(920.12,934.25) D12.2@962.23,936.35
  BottomLayer w10: v1@916.3,928.39 R35.2@891.32,948.84 ; v1@916.3,940.12 R35.2@891.32,919.66 ; v1@919.36,927.29 R35.2@887.84,934.25 ; v1@919.36,941.21 R35.2@887.84,934.25 ; v1@922.59,927.7 R35.2@891.32,919.66 ; v1@922.59,940.8 R35.2@891.32,948.84 ; R35.2@887.84,934.25 v1(920.12,934.25) ; R35.2@891.32,919.66 v1(920.12,934.25) ; R35.2@891.32,948.84 v1(920.12,934.25)
LED-003: D5.2 D13.2 R36.2 | length 1756.2
  TopLayer w10: D5.2@717.94,823.32 D13.2@969.2,823.32 ; D5.2@718.84,813.36 772.94,823.32 ; D5.2@718.84,833.28 772.94,823.32 ; D5.2@721.57,803.66 772.94,823.32 ; D5.2@721.57,842.99 772.94,823.32 ; v1@917.25,825.51 D13.2@959.07,840.5 ; v1@918.45,812.33 D13.2@960.66,805.53 ; v1@918.59,825.96 D13.2@961.34,832 ; v1@918.87,812.24 877.49,823.32 ; v1@919.93,812.13 D13.2@962.18,814.49 ; v1@920.01,826.13 D13.2@962.54,823.32 ; v1@920.24,826.13 877.49,823.32 ; v1@921.38,812.24 D13.2@962.54,823.32 ; v1@921.46,826 D13.2@962.18,814.49 ; v1@922.75,812.64 D13.2@961.34,832 ; v1@922.89,825.56 D13.2@960.66,805.53 ; v1@923.96,813.27 D13.2@959.07,840.5 ; D13.2@965.56,803.66 v1@914.2,823.32 ; D13.2@965.56,842.99 v1@914.2,823.32 ; D13.2@968.29,813.36 v1@914.2,823.32 ; D13.2@968.29,833.28 v1@914.2,823.32 ; 877.49,823.32 v1(920.12,819.13) ; v1(920.12,819.13) D13.2@960.66,805.53 ; v1(920.12,819.13) D13.2@959.07,840.5 ; v1(920.12,819.13) D13.2@962.18,814.49 ; v1(920.12,819.13) D13.2@961.34,832 ; v1(920.12,819.13) D13.2@962.54,823.32
  BottomLayer w10: v1@916.3,813.26 R36.2@891.32,833.72 ; v1@916.3,824.99 R36.2@891.32,804.54 ; v1@919.36,812.17 R36.2@887.84,819.13 ; v1@919.36,826.09 R36.2@887.84,819.13 ; v1@922.59,812.58 R36.2@891.32,804.54 ; v1@922.59,825.68 R36.2@891.32,833.72 ; R36.2@887.84,819.13 v1(920.12,819.13) ; R36.2@891.32,804.54 v1(920.12,819.13) ; R36.2@891.32,833.72 v1(920.12,819.13)
LED-004: D6.2 D14.2 R37.2 | length 1767.9
  TopLayer w10: D6.2@717.94,710.29 D14.2@969.2,710.29 ; D6.2@718.84,700.34 772.94,710.29 ; D6.2@718.84,720.25 772.94,710.29 ; D6.2@721.57,690.63 772.94,710.29 ; D6.2@721.57,729.96 772.94,710.29 ; v1@916.98,710.26 D14.2@958.96,727.43 ; v1@918.27,710.75 D14.2@961.47,719 ; v1@918.57,697.18 876.74,710.29 ; v1@918.76,697.14 D14.2@961.3,692.26 ; v1@919.67,710.99 D14.2@963.03,710.29 ; v1@920.27,697 D14.2@962.7,701.36 ; v1@920.57,710.99 876.74,710.29 ; v1@921.13,710.93 D14.2@962.7,701.36 ; v1@921.69,697.18 D14.2@963.03,710.29 ; v1@922.59,710.55 D14.2@961.3,692.26 ; v1@923.03,697.63 D14.2@961.47,719 ; v1@924.19,698.31 D14.2@958.96,727.43 ; D14.2@965.56,690.63 v1@914.2,710.29 ; D14.2@965.56,729.96 v1@914.2,710.29 ; D14.2@968.29,700.34 v1@914.2,710.29 ; D14.2@968.29,720.25 v1@914.2,710.29 ; 876.74,710.29 v1(920.12,704) ; v1(920.12,704) D14.2@961.3,692.26 ; v1(920.12,704) D14.2@958.96,727.43 ; v1(920.12,704) D14.2@962.7,701.36 ; v1(920.12,704) D14.2@961.47,719 ; v1(920.12,704) D14.2@963.03,710.29
  BottomLayer w10: v1@916.3,698.14 R37.2@891.32,718.59 ; v1@916.3,709.87 R37.2@891.32,689.41 ; v1@919.36,697.04 R37.2@887.84,704 ; v1@919.36,710.96 R37.2@887.84,704 ; v1@922.59,697.45 R37.2@891.32,689.41 ; v1@922.59,710.55 R37.2@891.32,718.59 ; R37.2@887.84,704 v1(920.12,704) ; R37.2@891.32,689.41 v1(920.12,704) ; R37.2@891.32,718.59 v1(920.12,704)
LED-005: D7.2 D15.2 R38.2 | length 1679.3
  TopLayer w10: D7.2@718.84,248.23 772.94,258.19 ; D7.2@718.84,268.15 772.94,258.19 ; D7.2@721.57,238.52 772.94,258.19 ; D7.2@721.57,277.85 772.94,258.19 ; v1@924.37,251.71 D15.2@965.56,238.52 ; v1@924.37,264.66 D15.2@965.56,277.85 ; v1@925.96,251.27 D15.2@968.29,248.23 ; v1@925.96,265.1 D15.2@968.29,268.15 ; v1@926.46,251.21 885.04,258.19 v1@926.46,265.16 ; v1@927.62,251.21 969.04,258.19 v1@927.62,265.16 ; v1@929.24,251.54 D15.2@968.29,268.15 ; v1@929.24,264.83 D15.2@968.29,248.23 ; v1@930.72,252.23 D15.2@965.56,277.85 ; v1@930.72,264.14 D15.2@965.56,238.52 ; D15.2@969.2,258.19 D7.2@717.94,258.19 772.94,258.19 ; 914.2,258.19 D15.2@965.56,238.52 ; 914.2,258.19 D15.2@965.56,277.85 ; 914.2,258.19 D15.2@968.29,248.23 ; 914.2,258.19 D15.2@968.29,268.15 ; 914.2,258.19 v1@925.13,251.45 ; 914.2,258.19 v1@925.13,264.92 ; 914.2,258.19 v1(927.04,258.19) ; 914.2,258.19 v1@925.13,251.45 ; 914.2,258.19 v1@925.13,264.92 ; 914.2,258.19 v1(927.04,258.19) ; 914.2,258.19 v1@925.13,251.45 ; 914.2,258.19 v1@925.13,264.92 ; 914.2,258.19 v1(927.04,258.19) ; 914.2,258.19 v1@925.13,251.45 ; 914.2,258.19 v1@925.13,264.92 ; 914.2,258.19 v1(927.04,258.19) ; v1(927.04,258.19) D15.2@965.56,238.52 ; v1(927.04,258.19) D15.2@965.56,277.85 ; v1(927.04,258.19) D15.2@968.29,248.23 ; v1(927.04,258.19) D15.2@968.29,268.15
  BottomLayer w10: v1@926.28,251.23 R38.2@894.76,258.19 ; v1@926.28,265.15 R38.2@894.76,258.19 ; v1(927.04,258.19) R38.2@894.76,258.19
LED-006: D8.2 D16.2 R39.2 | length 1818
  TopLayer w10: D8.2@717.94,371.21 D16.2@969.2,371.21 ; D8.2@718.84,361.25 772.94,371.21 ; D8.2@718.84,381.17 772.94,371.21 ; D8.2@721.57,351.55 772.94,371.21 ; D8.2@721.57,390.88 772.94,371.21 ; v1@924.37,364.74 D16.2@965.56,351.55 ; v1@924.37,377.69 D16.2@965.56,390.88 ; v1@925.96,364.3 D16.2@968.29,361.25 ; v1@925.96,378.13 D16.2@968.29,381.17 ; v1@926.46,364.24 885.04,371.21 v1@926.46,378.19 ; v1@927.62,364.24 969.04,371.21 v1@927.62,378.19 ; v1@929.24,364.57 D16.2@968.29,381.17 ; v1@929.24,377.86 D16.2@968.29,361.25 ; v1@930.72,365.26 D16.2@965.56,390.88 ; v1@930.72,377.17 D16.2@965.56,351.55 ; 914.2,371.21 D16.2@965.56,351.55 ; 914.2,371.21 D16.2@965.56,390.88 ; 914.2,371.21 D16.2@968.29,361.25 ; 914.2,371.21 D16.2@968.29,381.17 ; 914.2,371.21 v1@925.13,364.48 ; 914.2,371.21 v1@925.13,377.95 ; 914.2,371.21 v1(927.04,371.21) ; 914.2,371.21 v1@925.13,364.48 ; 914.2,371.21 v1@925.13,377.95 ; 914.2,371.21 v1(927.04,371.21) ; 914.2,371.21 v1@925.13,364.48 ; 914.2,371.21 v1@925.13,377.95 ; 914.2,371.21 v1(927.04,371.21) ; 914.2,371.21 v1@925.13,364.48 ; 914.2,371.21 v1@925.13,377.95 ; 914.2,371.21 v1(927.04,371.21) ; v1(927.04,371.21) D16.2@965.56,351.55 ; v1(927.04,371.21) D16.2@968.29,361.25 ; v1(927.04,371.21) D16.2@968.29,381.17 ; v1(927.04,371.21) D16.2@965.56,390.88
  BottomLayer w10: v1@923.22,365.35 R39.2@898.24,385.8 ; v1@923.22,377.08 R39.2@898.24,356.62 ; v1@926.28,364.25 R39.2@894.76,371.21 ; v1@926.28,378.17 R39.2@894.76,371.21 ; v1@929.51,364.66 R39.2@898.24,356.62 ; v1@929.51,377.76 R39.2@898.24,385.8 ; R39.2@894.76,371.21 v1(927.04,371.21) ; R39.2@898.24,356.62 v1(927.04,371.21) ; R39.2@898.24,385.8 v1(927.04,371.21)